# EAGLE board PCB (EAGLE 9.6.1)
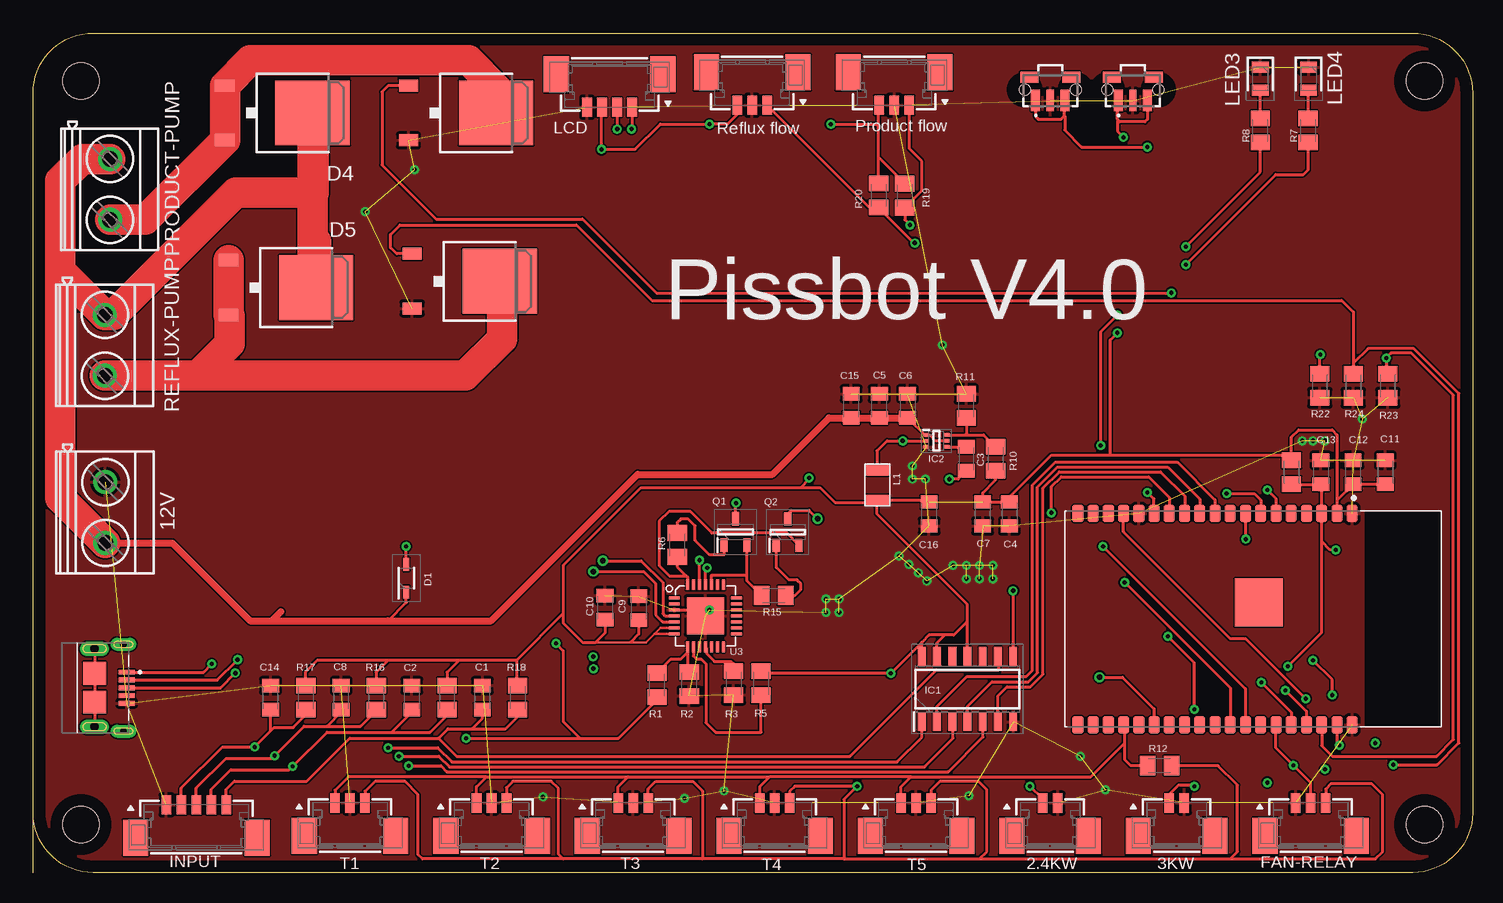
[diagram p0: board, top side]
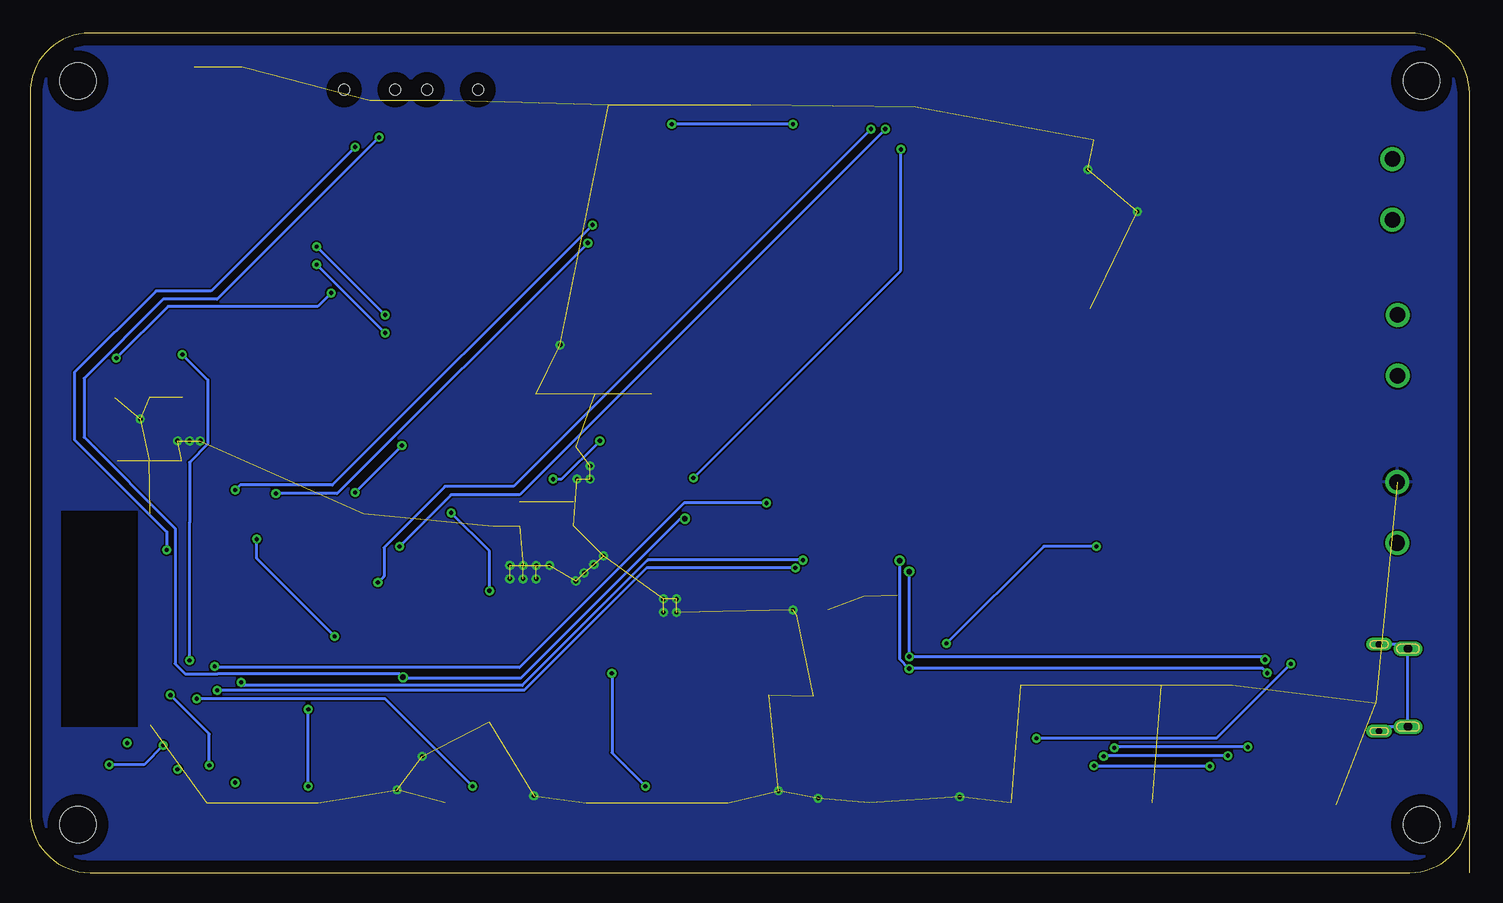
[diagram p1: board, bottom side, seen from below]

Size 120 x 70 mm. Coordinates in mm from the lower left corner, seen from the top.
Outline: 0,0 0,5
Outline: 0,5 0,65 arc-90 5,70 115,70 arc-90 120,65 120,5 arc-90 115,0 5,0 arc-90 0,5
Copper layers (1*16): Top 0.035mm / dielectric 1.5mm / Bottom 0.035mm
Design rules "default *": minimum track width 5mil, minimum drill 0.3mm, track to track 5mil, track to pad 6mil, pad to pad 6mil, via to via 6mil, smd to smd 6mil, copper to edge 40mil, drill to drill 6mil, minimum pad ring 10mil, minimum via ring 8mil, stop-mask expansion 4mil, vias tented up to drill 0mil, thermal gap 10mil
Holes 3 mm at 4,4 4,66 116,66 116,4

## Footprints (pad centres in the part's own frame; a part is rotated, then mirrored left to right if it is on the bottom)
53398-0210 = smd 0.8 x 1.6: 1 0.625,0; 2 -0.625,0 | smd 2.1 x 3: M1 3.185,2.75; M2 -3.185,2.75
MKDSN1,5/2-5,08 = drill 1.3 pad 2: 1 -2.561,0.025; 2 2.519,0.025
XCVR_ESP32-WROVER-I = smd 1.45 x 0.93: 1 -8.81,8.26; 2 -8.81,6.99; 3 -8.81,5.72; 4 -8.81,4.45; 5 -8.81,3.18; 6 -8.81,1.91; 7 -8.81,0.64; 8 -8.81,-0.63; 9 -8.81,-1.9; 10 -8.81,-3.17; 11 -8.81,-4.44; 12 -8.81,-5.71; 13 -8.81,-6.98; 14 -8.81,-8.25; 15 -8.81,-9.52; 16 -8.81,-10.79; 17 -8.81,-12.06; 18 -8.81,-13.33; 19 -8.81,-14.6; 20 8.81,-14.6; 21 8.81,-13.33; 22 8.81,-12.06; 23 8.81,-10.79; 24 8.81,-9.52; 25 8.81,-8.25; 26 8.81,-6.98; 27 8.81,-5.71; 28 8.81,-4.44; 29 8.81,-3.17; 30 8.81,-1.9; 31 8.81,-0.63; 32 8.81,0.64; 33 8.81,1.91; 34 8.81,3.18; 35 8.81,4.45; 36 8.81,5.72; 37 8.81,6.99; 38 8.81,8.26 | smd 4 x 4: 39 -1.38,0.47
C0805K = smd 1.1 x 1.4: 1 -1,0; 2 1,0
SOD2513X120N = smd 1.075 x 0.5: 1 -1.162,0; 2 1.162,0
TO252 = smd 1 x 1.6: 1 -2.28,-4.8; 3 2.28,-4.8 | smd 5.4 x 6.2: 2 0,2.5
53398-0310 = smd 0.8 x 1.6: 1 1.25,0; 2 0,0; 3 -1.25,0 | smd 2.1 x 3: M1 3.81,2.75; M2 -3.81,2.75
SOIC127P600X175-14N = smd 1.55 x 0.65: 1 -2.725,3.81; 2 -2.725,2.54; 3 -2.725,1.27; 4 -2.725,0; 5 -2.725,-1.27; 6 -2.725,-2.54; 7 -2.725,-3.81; 8 2.725,-3.81; 9 2.725,-2.54; 10 2.725,-1.27; 11 2.725,0; 12 2.725,1.27; 13 2.725,2.54; 14 2.725,3.81
SOTFL50P160X60-6N = smd 0.475 x 0.3: 1 -0.838,0.5; 2 -0.838,0; 3 -0.838,-0.5; 4 0.838,-0.5; 5 0.838,0; 6 0.838,0.5
53398-0510 = smd 0.8 x 1.6: 1 2.5,0; 2 1.25,0; 3 0,0; 4 -1.25,0; 5 -2.5,0 | smd 2.1 x 3: M1 5.06,2.75; M2 -5.06,2.75
TE_2040002-1 = smd 0.4 x 1.35: 1 -1.3,2.675; 2 -0.65,2.675; 3 0,2.675; 4 0.65,2.675; 5 1.3,2.675 | smd 1.9 x 1.9: S4 -1.2,0; S5 1.2,0 | drill 0.56 long: SH1 -3.615,2.4; SH2 3.615,2.4 | drill 0.71 long: SH3 3.255,0; SH4 -3.255,0
LB3218T2R2M = smd 0.85 x 2: P$1 -1.25,0; P$2 1.25,0
53398-0410 = smd 0.8 x 1.6: 1 1.875,0; 2 0.625,0; 3 -0.625,0; 4 -1.875,0 | smd 2.1 x 3: M1 4.435,2.75; M2 -4.435,2.75
LEDC2012X80N = smd 0.9 x 1.4: 1 -0.95,0; 2 0.95,0
SOT95P240X115-3N = smd 1.1 x 0.6: 1 -1.1,0.95; 2 -1.1,-0.95; 3 1.1,0
C0805K' = smd 1.3 x 1.6: 1 -1,0; 2 1,0
TL3340 = smd 0.75 x 1.8: 1 1.225,2.1; 3 -1.225,2.1 | smd 0.6 x 1.8: 2 0,2.1 | smd 1.5 x 0.9: 4 -1.75,0.15; 5 1.75,0.15 | hole 0.9: 2.125,1.2; -2.125,1.2
QFN28G_0.5-5X5MM = smd 0.9 x 0.254: 1 -2.59,1.5; 2 -2.59,1; 3 -2.59,0.5; 4 -2.59,0; 5 -2.59,-0.5; 6 -2.59,-1; 7 -2.59,-1.5; 15 2.59,-1.5; 16 2.59,-1; 17 2.59,-0.5; 18 2.59,0; 19 2.59,0.5; 20 2.59,1; 21 2.59,1.5 | smd 0.254 x 0.9: 8 -1.5,-2.59; 9 -1,-2.59; 10 -0.5,-2.59; 11 0,-2.59; 12 0.5,-2.59; 13 1,-2.59; 14 1.5,-2.59; 22 1.5,2.59; 23 1,2.59; 24 0.5,2.59; 25 0,2.59; 26 -0.5,2.59; 27 -1,2.59; 28 -1.5,2.59 | smd 3.1 x 3.1: 29 0,0

## Placement (x,y rotation side)
2.4KW  [53398-0210]  84.79,5.8 180 top
3KW  [53398-0210]  95.34,5.8 180 top
12V  [MKDSN1,5/2-5,08]  6,30 270 top
A1  ESP32-WROVER-I  [XCVR_ESP32-WROVER-I]  101.7,21.13 270 top
C1  2.2uF  [C0805K]  37.46,14.59 90 top
C2  2.2uF  [C0805K]  31.57,14.59 90 top
C3  100nF  [C0805K]  77.81,34.5 270 top
C4  100nF  [C0805K]  81.4,29.9 270 top
C5  10uF  [C0805K]  70.55,38.91 90 top
C6  10uF  [C0805K]  72.9,38.91 90 top
C7  22uF  [C0805K]  79.17,29.9 270 top
C8  2.2uF  [C0805K]  25.69,14.59 90 top
C9  4.7uF  [C0805K]  50.49,22.04 90 top
C10  0.1uF  [C0805K]  47.69,22.09 90 top
C11  0.1uF  [C0805K]  112.73,33.38 90 top
C12  22uF  [C0805K]  110.05,33.38 90 top
C13  22uF  [C0805K]  107.36,33.38 90 top
C14  2.2uF  [C0805K]  19.8,14.59 90 top
C15  100nF  [C0805K]  68.2,38.91 90 top
C16  22uF  [C0805K]  74.7,29.9 270 top
D1  BAT760-7  [SOD2513X120N]  31.11,24.54 90 top
D4  [TO252]  20.8,63.34 270 top
D5  [TO252]  21.1,48.78 270 top
F1  Product flow  [53398-0310]  71.79,63.98 0 top
F2  Reflux flow  [53398-0310]  59.95,63.98 0 top
FAN-RELAY  [53398-0310]  106.51,5.8 180 top
IC1  MC14106BDR2G  [SOIC127P600X175-14N]  77.9,15.3 90 top
IC2  TPS563231DRLR  [SOTFL50P160X60-6N]  75.3,36 0 top
INPUT  [53398-0510]  13.62,5.65 180 top
J2  Micro USB  [TE_2040002-1]  5.13,15.41 270 top
L1  2.2uH  [LB3218T2R2M]  70.4,32.3 270 top
LCD  [53398-0410]  48.06,63.82 0 top
LED3  [LEDC2012X80N]  102.3,66.19 270 top
LED4  [LEDC2012X80N]  106.33,66.19 270 top
PRODUCT-PUMP  [MKDSN1,5/2-5,08]  6.4,56.94 270 top
Q1  SS8050-G  [SOT95P240X115-3N]  58.56,28.4 90 top
Q2  SS8050-G  [SOT95P240X115-3N]  62.91,28.38 90 top
R1  22.1k  [C0805K']  52.01,15.64 90 top
R2  47.5k  [C0805K']  54.7,15.72 90 top
R3  10k  [C0805K']  58.4,15.8 90 top
R4  10k  [C0805K']  104.9,33.38 270 top
R5  2k  [C0805K']  60.69,15.79 270 top
R6  10k  [C0805K']  53.7,27.32 270 top
R7  1k  [C0805K']  106.29,61.87 90 top
R8  33  [C0805K']  102.3,61.87 90 top
R10  45.3k  [C0805K']  80.24,34.5 90 top
R11  10k  [C0805K']  77.8,38.91 90 top
R12  4.7k  [C0805K']  93.9,8.91 180 top
R14  1k  [C0805K']  34.51,14.59 90 top
R15  10k  [C0805K']  61.74,23.1 180 top
R16  1k  [C0805K']  28.63,14.59 90 top
R17  1k  [C0805K']  22.74,14.59 90 top
R18  1k  [C0805K']  40.4,14.59 90 top
R19  1k  [C0805K']  72.67,56.44 270 top
R20  1k  [C0805K']  70.49,56.45 270 top
R22  4.7k  [C0805K']  107.26,40.59 270 top
R23  4.7k  [C0805K']  112.93,40.59 270 top
R24  4.7k  [C0805K']  110.06,40.59 270 top
REFLUX-PUMP  [MKDSN1,5/2-5,08]  5.97,43.94 270 top
S1  BOOT  [TL3340]  91.68,66.47 180 top
S2  EN  [TL3340]  84.79,66.47 180 top
T1  [53398-0310]  26.43,5.8 180 top
T2  [53398-0310]  38.23,5.8 180 top
T3  [53398-0310]  50.02,5.8 180 top
T4  [53398-0310]  61.82,5.8 180 top
T5  [53398-0310]  73.62,5.8 180 top
U3  INTERFACE-CP2102-GMR(QFN28)  [QFN28G_0.5-5X5MM]  56.05,21.41 0 top
U$2  FET 1  [TO252]  36.1,63.34 270 top
U$5  FET 2  [TO252]  36.4,49.31 270 top

## Library data of the parts
2.4KW 3KW F1 F2 FAN-RELAY INPUT LCD T1-T5 = con-molex-picoblade; OC_FARNELL: unknown
12V PRODUCT-PUMP REFLUX-PUMP = con-phoenix-508; OC_FARNELL: unknown
A1 = ESP32-WROVER-I; AVAILABILITY: Unavailable; DESCRIPTION: Module: combo; GPIO, I2C x2, I2S x2, SDIO, SPI x3, UART x3; U.FL; MF: Espressif Systems; MP: ESP32-WROVER-I; PACKAGE: Module Espressif Systems; PRICE: None
C1-C16 = adafruit
D1 = BAT760-7; ALLIED_NUMBER: 70437639; ALLIED_PRICE-STOCK: https://www.alliedelec.com/diodes-inc-bat760-7/70437639/; DESCRIPTION: Diode Schottky 30V 1A 2Pin SOD323 Diodes Inc BAT760-7, SMT Schottky Diode, 30V 1A, 2-Pin SOD-323; HEIGHT: 1.2mm; MANUFACTURER_NAME: Diodes Inc.; MANUFACTURER_PART_NUMBER: BAT760-7; MOUSER_PART_NUMBER: 621-BAT760-7; MOUSER_PRICE-STOCK: https://www.mouser.com/Search/Refine.aspx?Keyword=621-BAT760-7; RS_PART_NUMBER: 7513427; RS_PRICE-STOCK: https://uk.rs-online.com/web/p/products/7513427
D4 D5 = My Parts; MF: BOURNS; MPN: PWR163S-25-2R20JE; OC_FARNELL: 2813921
IC1 = MC14106BDR2G; ALLIED_NUMBER: 70339962; ALLIED_PRICE-STOCK: http://www.alliedelec.com/on-semiconductor-mc14106bdr2g/70339962/; HEIGHT: 1.75mm; MANUFACTURER_NAME: ON Semiconductor; MANUFACTURER_PART_NUMBER: MC14106BDR2G; MOUSER_PART_NUMBER: 863-MC14106BDR2G; MOUSER_PRICE-STOCK: https://www.mouser.com/Search/Refine.aspx?Keyword=863-MC14106BDR2G; RS_PART_NUMBER: 6881546P; RS_PRICE-STOCK: http://uk.rs-online.com/web/p/products/6881546P
IC2 = TPS563231DRLR; DESCRIPTION: 4.5-V to 17-V input, 3-A synchronous step-down voltage regulator; HEIGHT: 0.6mm; MANUFACTURER_NAME: Texas Instruments; MANUFACTURER_PART_NUMBER: TPS563231DRLR; MOUSER_PART_NUMBER: 595-TPS563231DRLR; MOUSER_PRICE-STOCK: https://www.mouser.com/Search/Refine.aspx?Keyword=595-TPS563231DRLR
J2 = 2040002-1; AVAILABILITY: Unavailable; CENTERLINE_PITCH: .65 mm[.025 in]; COMMENT: 2040002-1; DESCRIPTION: Micro USB REC type B DIP 4 legs assy_Au_; MF: TE Connectivity; MP: 2040002-1; NUMBER_OF_POSITIONS: 5; PACKAGE: None; PRICE: None; PRODUCT_TYPE: Connector; TE_PURCHASE_URL: https://www.te.com/usa-en/product-2040002-1.html?te_bu=Cor&te_type=disp&te_campaign=seda_glo_cor-seda-global-disp-prtnr-fy19-seda-model-bom-cta_sma-317_1&elqCampaignId=32493
L1 R1-R8 R10 R11 R15 U$2 U$5 = My Parts
LED3 LED4 = SML-H12V8TT86C; DESCRIPTION: ROHM - SML-H12V8TT86C - CHIP LED, AEC-Q101, RED, 25MCD, 0805; HEIGHT: 0.8mm; MANUFACTURER_NAME: ROHM Semiconductor; MANUFACTURER_PART_NUMBER: SML-H12V8TT86C; MOUSER_PART_NUMBER: 755-SML-H12V8TT86C; MOUSER_PRICE-STOCK: https://www.mouser.com/Search/Refine.aspx?Keyword=755-SML-H12V8TT86C
Q1 Q2 = SS8050-G; DESCRIPTION: Bipolar Transistors - BJT NPN TRANSISTOR 1.5A 40V; HEIGHT: 1.15mm; MANUFACTURER_NAME: Comchip Technology; MANUFACTURER_PART_NUMBER: SS8050-G; MOUSER_PART_NUMBER: 750-SS8050-G; MOUSER_PRICE-STOCK: https://www.mouser.com/Search/Refine.aspx?Keyword=750-SS8050-G
R12 R14 R16-R20 R22-R24 = My Parts; OC_FARNELL: unknown
S1 S2 = TL3340AF160QG; DESCRIPTION: E-SWITCH - TL3340AF160QG. - SWITCH, TACTILE SPST 50mA, SMD GULL WING; HEIGHT: mm; MANUFACTURER_NAME: E-Switch; MANUFACTURER_PART_NUMBER: TL3340AF160QG; MOUSER_PART_NUMBER: 612-TL3340AF160QG; MOUSER_PRICE-STOCK: https://www.mouser.com/Search/Refine.aspx?Keyword=612-TL3340AF160QG
U3 = INTERFACE-CP2102-GMR_QFN28_; AVAILABILITY: Unavailable; MF: Silicon; MP: CP2102-GMR; PACKAGE: VFQFN-28 Vishay Siliconix; PRICE: None

## Nets
1WIRE: A1.23 R12.2 T1.1 T2.1 T3.1 T4.1 T5.1
2.4KW-SIGNAL: 2.4KW.1 A1.16
3KW-SIGNAL: 3KW.1 A1.8
BST: C3.1 IC2.4
CTS: U3.23
DSR: U3.27
DTR: Q2.2 R6.2 U3.28
EN: A1.3 C13.1 Q1.3 R4.2 S2.1 S2.3
EXP: A1.39
EXT_V: 12V.2 C5.1 C6.1 C15.1 D1.1 D4.2 D5.2 IC2.1 IC2.5 PRODUCT-PUMP.1 REFLUX-PUMP.1
FAN-SIGNAL: A1.33 FAN-RELAY.2 R22.1
GND: 2.4KW.2 3KW.2 12V.1 A1.1 A1.15 A1.38 C1.2 C2.2 C4.2 C5.2 C6.2 C7.2 C8.2 C9.2 C10.2 C11.2 C12.2 C13.2 C14.2 C15.2 C16.2 F1.2 F2.2 FAN-RELAY.1 IC1.7 IC2.3 INPUT.1 J2.5 LCD.4 LED3.1 LED4.1 R2.1 R3.1 R11.2 R22.2 R23.2 R24.2 S1.2 S2.2 T1.2 T2.2 T3.2 T4.2 T5.2 U3.3 U3.29 U$2.3 U$5.3
INPUT-DOWN: A1.11 IC1.4
INPUT-DOWN-RAW: C8.1 IC1.3 INPUT.3 R16.1
INPUT-LEFT: A1.12 IC1.6
INPUT-LEFT-RAW: C2.1 IC1.5 INPUT.4 R14.1
INPUT-MID: A1.13 IC1.8
INPUT-MID-RAW: C1.1 IC1.9 INPUT.5 R18.1
INPUT-UP: A1.10 IC1.2
INPUT-UP-RAW: C14.1 IC1.1 INPUT.2 R17.1
IO0: A1.25 Q2.3 S1.1 S1.3
LCD-SCL: A1.30 LCD.1
LCD-SDA: A1.31 LCD.2
LED1: A1.14 R8.1
N$1: R3.2 U3.11
N$2: R5.2 U3.9
N$3: R1.2 R2.2 U3.8
N$6: LED4.2 R7.2
N$7: LED3.2 R8.2
N$13: IC2.6 R10.2 R11.1
N$14: D4.1 D4.3 PRODUCT-PUMP.2 U$2.2
N$16: D5.1 D5.3 REFLUX-PUMP.2 U$5.2
N$19: Q1.1 R6.1
N$20: Q2.1 R15.1
PRODUCT-FLOW: A1.6 F1.1 R19.2
PRODUCT-PUMP: A1.36 R23.1 U$2.1
REFLUX-FLOW: A1.7 F2.1 R20.2
REFLUX-PUMP: A1.37 R24.1 U$5.1
RTS: Q1.2 R15.2 U3.24
RXD: A1.35 U3.25
SHIELD: J2.S4 J2.S5 J2.SH1 J2.SH2 J2.SH3 J2.SH4
SW: C3.2 IC2.2 L1.P$1
TXD: A1.34 U3.26
USB_DN: J2.2 U3.5
USB_DP: J2.3 U3.4
VBUS: D1.2 J2.1 R1.1
VDD33: A1.2 C4.1 C7.1 C9.1 C10.1 C11.1 C12.1 C16.1 F1.3 F2.3 FAN-RELAY.3 IC1.11 IC1.13 IC1.14 L1.P$2 LCD.3 R4.1 R5.1 R7.1 R10.1 R12.1 R14.2 R16.2 R17.2 R18.2 R19.1 R20.1 T1.3 T2.3 T3.3 T4.3 T5.3 U3.6 U3.7

## Tracks (layer width: path | path; a pad name or v marks a point on that pad's centre or on a via)
1WIRE
  Top 0.254: 73.2,8 88.2,8 91,10.8 | 91,10.8 91,12.23 A1.23 | 37.8,7.99 49.6,7.99 | 73.2,8 61.41,8 61.4,7.99 | T2.1 36.98,7.17 37.8,7.99 | T3.1 48.77,7.17 49.6,7.99 | T5.1 72.37,7.17 73.2,8 | 49.6,7.99 61.4,7.99 | 61.4,7.99 60.57,7.16 T4.1 | R12.2 91.51,8.91 91.5,8.9 91,9.4 91,10.8 | T1.1 25.18,6.88 26.29,7.99 37.8,7.99
2.4KW-SIGNAL  (via drill 0.35)
  Top 0.254: 2.4KW.1 84.17,6.13 v83.1,7.2 | v106.1,14.5 101.1,19.5 99.8,19.5 90.9,28.4 A1.16
  Bottom 0.254: v83.1,7.2 90.4,14.5 v106.1,14.5
3KW-SIGNAL  (via drill 0.35)
  Top 0.254: 3KW.1 94.71,6.51 95.5,7.3 96.7,7.3 v96.8,7.2 | v96.8,13.6 96.8,17.5 v94.6,19.7 | v101.1,27.8 101.1,29.91 A1.8
  Bottom 0.254: v96.8,7.2 v96.8,13.6 | v94.6,19.7 101.1,26.2 v101.1,27.8
BST
  Top 0.254: IC2.4 C3.1
DTR
  Top 0.254: R6.2 53.7,25.5 54.45,24.75 | U3.28 54.55,24.65 54.45,24.75 | Q2.2 62.84,28.3 56.6,28.3 54.8,30.1 53,30.1 52.2,29.3 52.2,25.6 53.05,24.75 54.45,24.75
EN  (via drill 0.35)
  Top 0.254: Q1.3 58.56,30.76 v58.6,30.8 | v104.6,17.2 107.42,20.02 107.42,27.6 | 107.42,27.6 A1.3 107.42,32.32 C13.1 R4.2 | S2.1 83.56,63.03 83.8,62.8 85.7,62.8 85.99,63.09 | 85.99,63.09 86,63.08 86,61.9 87.4,60.5 v92.9,60.5 | v108.6,26.9 108.12,26.9 107.42,27.6 | 85.99,63.09 85.99,63.94 85.79,64.14 S2.3
  Bottom 0.254: v58.6,30.8 65.5,30.8 79.2,17.1 104.5,17.1 v104.6,17.2 | v92.9,60.5 104.9,48.5 109.5,48.5 116.3,41.7 116.3,36.1 108.6,28.4 v108.6,26.9
EXT_V
  Top 0.254: 29.6,21 31.11,22.51 D1.1 | 74.53,36.43 74.81,36.43 75.25,36 IC2.5 | 74.53,36.43 IC2.1 | C6.1 74.38,36.43 74.53,36.43
  Top 0.6: 12V.2 11.62,27.48 18.1,21 19.9,21 | 19.9,21 20.67,21.77 | 19.9,21 29.6,21 38.2,21 50.4,33.2 61.63,33.2 66.34,37.91 C15.1 C5.1 C6.1
  Top 2.54: 2.29,50.21 REFLUX-PUMP.1 6.7,46.5 16.9,56.7 23.4,56.7 23.4,62.7 23.3,62.7 23.3,52.9 | 2.29,50.21 2.29,57.7 4.09,59.5 PRODUCT-PUMP.1 | 23.3,52.9 23.3,49.2 23.6,48.9 | 12V.2 2.29,31.22 2.29,50.21 | 23.3,52.9 23.6,52.6 23.6,48.9 | D4.2 23.3,49.08 D5.2 23.6,48.9
FAN-SIGNAL  (via drill 0.35)
  Top 0.254: FAN-RELAY.2 106.51,7.49 v105.05,8.95 103.61,10.39 A1.33 | v108.3,14.8 108.3,16.1 v106.7,17.7 | R22.1 107.26,43.16 v107.3,43.2
  Bottom 0.254: v105.05,8.95 105.05,11.55 v108.3,14.8 | v106.7,17.7 106.7,28.5 106.7,29.2 106.7,34.21 105.17,35.74 105.17,41.07 v107.3,43.2
GND  (via drill 0.35)  (78 unrouted)
  Top 0.254: U3.3 55.55,21.91 U3.29
  other vias: 27.7,55.1 31.8,58.6 89.4,6.9 87.3,9.7 78,6.4 57.6,6.8 54.3,6.2 42.5,6.3 75.8,44 105.8,36 110.8,37.8 56.4,21.9 76.7,25.6 74.5,24.3 73.8,25 73,25.7 72.2,26.4 67.2,22.8 66.1,22.8 66.1,21.7 67.2,21.7 77.8,25.6 78.9,25.6 80,25.6 77.8,24.5 78.9,24.5 80,24.5 73.3,33.9 73.3,32.8 74.4,32.8 106.7,36 107.7,36
  pour Bottom: -11.1,75.4 -11.1,-0.2 -0.5,-10.8 116.3,-10.8 130.6,3.5 130.6,66.9 119.5,78 -8.5,78
  pour Top: -7.3,72.6 124.4,72.6 127.2,69.8 127.2,-1.8 126.1,-2.9 123.6,-5.4 -1.6,-5.4 -7.2,0.2 -7.2,72.5
INPUT-DOWN
  Top 0.254: A1.11 97.26,31.14 94.59,33.81 85.39,33.81 83.74,32.16 83.74,16.66 82.98,15.9 79.94,15.9 77.9,13.86 IC1.4
INPUT-DOWN-RAW  (via drill 0.35 pad 0.2, 0.35 pad 0.3)
  Top 0.254: IC1.3 76.7,12.51 76.7,11.2 74.31,8.81 34.71,8.81 33.82,9.7 v30.5,9.7 | INPUT.3 13.62,7.05 16.09,9.52 19.92,9.52 v20.15,9.75 22.6,12.2 24.5,12.2 | 24.5,12.2 25.79,13.49 C8.1 | 24.5,12.2 27.3,12.2 28.63,13.53 R16.1
  Bottom 0.254: v20.15,9.75 29.32,9.75 29.33,9.74 30.46,9.74 v30.5,9.7
INPUT-LEFT
  Top 0.254: A1.12 96,31.4 93.99,33.41 85.56,33.41 84.2,32.05 84.2,16.54 83.15,15.49 81.2,15.49 80.44,14.73 IC1.6
INPUT-LEFT-RAW  (via drill 0.35 pad 0.2, 0.35 pad 0.3)
  Top 0.254: IC1.5 79.2,12.54 79.2,11.3 76.31,8.41 34.49,8.41 34,8.9 v31.3,8.9 | INPUT.4 14.87,6.96 16.48,8.57 21.37,8.57 v21.65,8.85 24.5,11.7 29.9,11.7 | 29.9,11.7 31.68,13.48 C2.1 | 29.9,11.7 33.1,11.7 34.51,13.11 R14.1
  Bottom 0.254: v21.65,8.85 31.25,8.85 v31.3,8.9
INPUT-MID  (via drill 0.35 pad 0.2)
  Top 0.254: A1.13 94.72,31.28 93,33 85.72,33 84.9,32.18 v84.9,30 | IC1.8 v81.71,23.49 v81.7,23.5
  Bottom 0.254: v81.7,23.5 81.7,26.8 v84.9,30
INPUT-MID-RAW
  Top 0.254: IC1.9 80.5,17.96 80.5,16.9 75.3,16.9 68.1,9.7 35.3,9.7 33.8,11.2 | INPUT.5 16.12,6.96 16.78,7.62 22.82,7.62 26.4,11.2 33.8,11.2 | R18.1 40.69,13.29 39.4,12 36.6,12 | 33.8,11.2 34.6,12 36.6,12 | 36.6,12 37.46,12.86 C1.1
INPUT-UP
  Top 0.254: A1.10 98.53,31.07 95.38,34.22 85.22,34.22 83.3,32.3 83.3,16.84 82.8,16.34 77.84,16.34 75.36,13.86 IC1.2
INPUT-UP-RAW  (via drill 0.35 pad 0.2, 0.35 pad 0.3)
  Top 0.254: IC1.1 74.09,11.29 72.02,9.22 34.93,9.22 33.74,10.4 v29.6,10.4 | INPUT.2 12.37,7.05 15.79,10.47 v18.47,10.47 19.8,11.8 | 19.8,11.8 20.1,12.1 21.7,12.1 22.74,13.14 R17.1 | 19.8,11.8 C14.1
  Bottom 0.254: v18.47,10.47 29.53,10.47 v29.6,10.4
IO0  (via drill 0.35, 0.45 pad 0.2)
  Top 0.254: Q2.3 62.91,29.91 63.2,30.2 64.7,30.2 v65.4,29.5 | v88.9,16.28 90.82,16.28 93.45,13.65 A1.25 | S1.3 92.91,62.8 92.7,62.6 90.6,62.6 90.4,62.8 | 90.4,62.8 90.4,61.8 v90.9,61.3 | 90.4,62.8 90.4,63.7 | 90.4,63.7 90.4,63.86 90.68,64.14 | S1.1 90.45,63.76 90.4,63.7
  Bottom 0.254: v65.4,29.5 65.8,29.5 79.1,16.2 88.82,16.2 v88.9,16.28 89.22,16.6 104.31,16.6 104.34,16.57 107.07,16.57 107.9,17.4 107.9,28.7 115.5,36.3 115.5,41.2 108.9,47.8 104.4,47.8 v90.9,61.3
LCD-SCL  (via drill 0.35)
  Top 0.254: LCD.1 49.94,62.03 v49.9,62 | v91,24.2 99.8,15.4 A1.30
  Bottom 0.254: v49.9,62 79.7,32.2 85.4,32.2 90.5,27.1 90.5,24.7 v91,24.2
LCD-SDA  (via drill 0.35)
  Top 0.254: LCD.2 48.69,62.02 v48.7,62 | v89.2,27.2 101.07,15.33 A1.31
  Bottom 0.254: v48.7,62 79.2,31.5 84.9,31.5 v89.2,27.2
LED1  (via drill 0.35)
  Top 0.254: A1.14 93.45,31.15 v92.9,31.7 | v90.4,46.5 89,45.1 v89,35.6 | v96.1,52.2 102.3,58.4 R8.1
  Bottom 0.254: v92.9,31.7 v89,35.6 | v90.4,46.5 v96.1,52.2
N$1
  Top 0.254: U3.11 56.14,18.73 56.14,18.25 56.8,17.6 58.2,17.6 58.4,17.4 R3.2
N$2
  Top 0.254: U3.9 55.05,18.05 55.3,17.8 55.7,17.8 56.1,17.4 56.1,12.5 56.9,11.7 60.69,11.7 R5.2
N$3
  Top 0.254: U3.8 54.55,18.35 | 54.55,18.35 54.55,16.87 R2.2 | R1.2 53.17,17.8 54,17.8 54.55,18.35
N$6
  Top 0.254: R7.2 106.29,65.2 LED4.2
N$7
  Top 0.254: R8.2 LED3.2
N$13
  Top 0.254: R10.2 79.24,36.5 77.7,36.5 | IC2.6 77.7,36.5 | R11.1 77.8,36.6 77.7,36.5
N$14
  Top 2.54: PRODUCT-PUMP.2 9.36,54.42 D4.3 D4.1 18.09,67.71 36.3,67.71 38.6,65.41 U$2.2
N$16
  Top 2.54: REFLUX-PUMP.2 13.72,41.42 | 13.72,41.42 16.4,44.1 16.4,46.4 D5.3 D5.1 | 13.72,41.42 36.02,41.42 39.1,44.5 39.1,49.11 U$5.2
N$17  (via drill 0.35)
  other vias: 111.9,10.8
N$18  (via drill 0.35)
  other vias: 102.9,7.5
N$19
  Top 0.254: Q1.1 57.61,26.51 57.6,26.5 56.4,26.5 55.2,27.7 55.2,28.9 54.6,29.5 54,29.5 53.7,29.2 R6.1
N$20
  Top 0.254: R15.1 63.5,23.1 64,23.6 64,24.1 63.7,24.4 63,24.4 61.96,25.44 Q2.1
N$21  (via drill 0.35)
  other vias: 107.7,8.6
PRODUCT-FLOW  (via drill 0.35)
  Top 0.254: F1.1 73.04,60.36 74.1,59.3 74.1,56.87 R19.2 72.67,54.43 v73.1,54 | v102.9,31.9 103.61,31.19 A1.6
  Bottom 0.254: v73.1,54 94.8,32.3 102.5,32.3 v102.9,31.9
PRODUCT-PUMP  (via drill 0.35)
  Top 0.254: A1.36 107.42,10.58 108.3,9.7 117,9.7 118.4,11.1 118.4,39.8 114.9,43.3 113.2,43.3 v112.8,42.9 112.8,41.72 R23.1 | U$2.1 29.62,65.62 29.1,65.1 29.1,59 33.6,54.5 45.8,54.5 51.97,48.33 v94.9,48.33
  Bottom 0.254: v94.9,48.33 96.03,47.2 108.5,47.2 v112.8,42.9
REFLUX-FLOW  (via drill 0.35)
  Top 0.254: F2.1 69.73,55.45 R20.2 73.44,52.5 v73.5,52.5 | v99.5,31.6 101.8,31.6 102.34,31.06 A1.7
  Bottom 0.254: v73.5,52.5 94.4,31.6 v99.5,31.6
REFLUX-PUMP  (via drill 0.35)
  Top 0.254: A1.37 108.69,10.81 v108.9,10.6 | v113.4,9 117.06,9 118.86,10.8 118.86,39.94 115.1,43.7 111.3,43.7 110.06,42.46 | 110.06,42.46 110.06,42 R24.1 | U$5.1 30.31,51.59 29.8,52.1 29.8,53.2 30.6,54 45.3,54 51.6,47.7 109.1,47.7 110.06,46.74 110.06,42.46
  Bottom 0.254: v108.9,10.6 110.5,9 v113.4,9
RTS
  Top 0.254: U3.24 56.55,24.75 56.6,24.8 59.4,24.8 59.51,24.91 | 59.51,24.91 59.51,25.2 Q1.2 | R15.2 59.51,24.33 59.51,24.91
RXD  (via drill 0.35 pad 0.2)
  Top 0.254: v56.2,25.4 56.05,25.25 U3.25 | v104.4,15.2 106.15,13.45 A1.35
  Bottom 0.254: v56.2,25.4 68.6,25.4 78.81,15.19 v104.39,15.19 v104.4,15.2
SHIELD
  Top 0.254: J2.SH4 J2.S4 J2.S5 J2.SH3
  Bottom 0.254: J2.SH2 7.17,12.15 J2.SH3 J2.SH4 5.49,19.02 J2.SH1
SW  (via drill 0.35)
  Top 0.254: C3.2 77.11,32.8 v76.4,32.8 | IC2.2 v72.5,36 71.2,36 70.35,35.15 70.35,33.6 L1.P$1
  Bottom 0.254: v76.4,32.8 75.7,32.8 v72.5,36
TXD  (via drill 0.35 pad 0.2)
  Top 0.254: U3.26 55.55,25.12 55.54,25.13 55.54,26.03 v55.56,26.04 | v102.4,15.85 104.88,13.37 A1.34
  Bottom 0.254: v55.56,26.04 55.91,26.04 55.93,26.06 68.52,26.06 78.97,15.6 102.15,15.6 v102.4,15.85
USB_DN  (via drill 0.35 pad 0.2, 0.45 pad 0.2)
  Top 0.254: J2.2 15.36,16.06 v17.05,17.75 | v46.7,25.1 50.9,25.1 51.9,24.1 51.9,21.5 52.49,20.91 U3.5
  Bottom 0.254: v17.05,17.75 17.29,18 v46.7,18 v46.7,25.1
USB_DP  (via drill 0.35 pad 0.2, 0.45 pad 0.2)
  Top 0.254: U3.4 52.7,21.4 52.5,21.6 52.5,24.2 50.7,26 v47.5,26 | v16.86,16.64 15.64,15.41 J2.3
  Bottom 0.254: v16.86,16.64 17.24,17.01 v46.71,17.01 v46.71,17 47.5,17.79 v47.5,26
VBUS  (via drill 0.35, 0.35 pad 0.2)
  Top 0.254: R1.1 52.01,14.41 48.8,11.2 45.6,11.2 | J2.1 14.21,16.71 v14.9,17.4 | v36.1,11.2 45.6,11.2 | D1.2 v31.11,27.19 v31.1,27.2 | v43.6,19.1 44.2,18.5 44.2,12.6 45.6,11.2
  Bottom 0.254: v14.9,17.4 21.1,11.2 v36.1,11.2 | v31.1,27.2 35.5,27.2 v43.6,19.1
VDD33  (via drill 0.35)  (1 unrouted)
  Top 0.203: 46.9,19.2 49.8,19.2 51.1,19.2 51.81,19.91 | U3.6 52.31,20.41 51.81,19.91 | U3.7 51.81,19.91 | 77.85,18.07 IC1.11
  Top 0.254: 44.2,21.6 44.2,25.6 50.7,32.1 64,32.1 | 44.2,21.6 44.2,20.8 45.8,19.2 46.9,19.2 47.69,19.99 C10.1 | 77.85,20.9 77.85,22.4 70.35,29.9 70.35,30.72 70.21,30.86 | 77.85,20.9 77.85,18.07 | 77.85,20.9 76.75,19.8 76,19.8 | 74.1,19.2 74.7,19.8 76,19.8 | 74.1,19.2 74.1,18.6 74.09,18.59 IC1.14 | IC1.13 75.36,19.16 76,19.8 | 44.2,21.6 40.3,17.7 | 35.5,17.7 34.5,16.7 34.5,15.6 R14.2 | 40.3,17.7 35.5,17.7 | 35.5,17.7 29.6,17.7 | 29.6,17.7 28.6,16.7 28.6,15.62 R16.2 | 29.6,17.7 23.7,17.7 22.7,16.7 22.7,15.63 R17.2 | 40.3,17.7 40.3,15.69 R18.2 | C9.1 50.49,19.89 49.8,19.2 | 74.1,19.2 v71.5,16.6 60.88,16.6 R5.1 | T4.3 63.07,6.77 63.5,7.2 v68.7,7.2 67.6,6.1 67.6,1.14 | 67.6,1.14 78.9,1.14 | 78.9,1.14 79.5,1.74 79.5,6.9 78.8,7.6 75.6,7.6 74.87,6.87 T5.3 | 78.9,1.14 99.8,1.14 | 99.8,1.14 111.9,1.14 112.5,1.74 112.5,6.5 111.6,7.4 108.2,7.4 107.76,6.96 FAN-RELAY.3 | 99.8,1.14 100.4,1.74 100.4,7.3 98.79,8.91 R12.1 | 44.2,1.14 43.8,1.54 43.8,7.01 43.2,7.61 40.01,7.61 39.48,7.08 T2.3 | 67.6,1.14 55.8,1.14 | 55.8,1.14 44.2,1.14 | T3.3 51.27,6.97 51.9,7.6 55,7.6 55.8,6.8 55.8,1.14 | 44.2,1.14 32.46,1.14 32.1,1.5 32.1,6.5 31,7.6 28.5,7.6 27.68,6.78 T1.3 | LCD.3 47.4,63.78 v47.4,60.3 50.2,60.3 52.3,62.4 v56.4,62.4 57.9,62.4 58.7,63.2 F2.3 | 106.03,60.87 R7.1 106.3,58.6 105.9,58.2 103.6,58.2 v96.1,50.7 | R20.1 70.49,59.6 | 70.49,59.6 70.49,62.3 | 70.49,62.3 70.49,63.93 F1.3 | R19.1 70.51,59.6 70.49,59.6 | C16.1 74.66,30.86 74.47,31.05 L1.P$2 70.21,30.86 | R10.1 80.24,32.74 79.17,31.67 C7.1 C4.1 81.4,31.3 84.9,34.8 89.8,34.8 | 64,32.1 65.6,32.1 66.84,30.86 70.21,30.86 | C11.1 C12.1 108.7,31.03 | A1.2 108.69,31.02 108.7,31.03
  Top 0.254: 108.7,31.03 108.7,36.5 108.3,36.9 105.5,36.9 104.9,36.3 R4.1 104.48,34.8 89.8,34.8 | 64,32.1 64.7,32.8 v64.7,32.9 | v66.5,62.4 70.39,62.4 70.49,62.3 | 89.8,34.8 89.8,44.4 v90.4,45
  Bottom 0.254: v71.5,16.6 71.5,10 v68.7,7.2 | v64.7,32.9 47.4,50.2 v47.4,60.3 | v56.4,62.4 v66.5,62.4 | v90.4,45 v96.1,50.7

## Text on the board
tNames: Pissbot V4.0